# Altium PCB TestBoard V2.PcbDoc
Units mil, origin at the board's own origin, x right, y up, seen from the top; angles counter-clockwise.
Board outline 6879.37 x 4267.72 mil, 2 copper layers (Top Layer, Bottom Layer); 5 components, 44 nets, 132 pads, 74 vias.
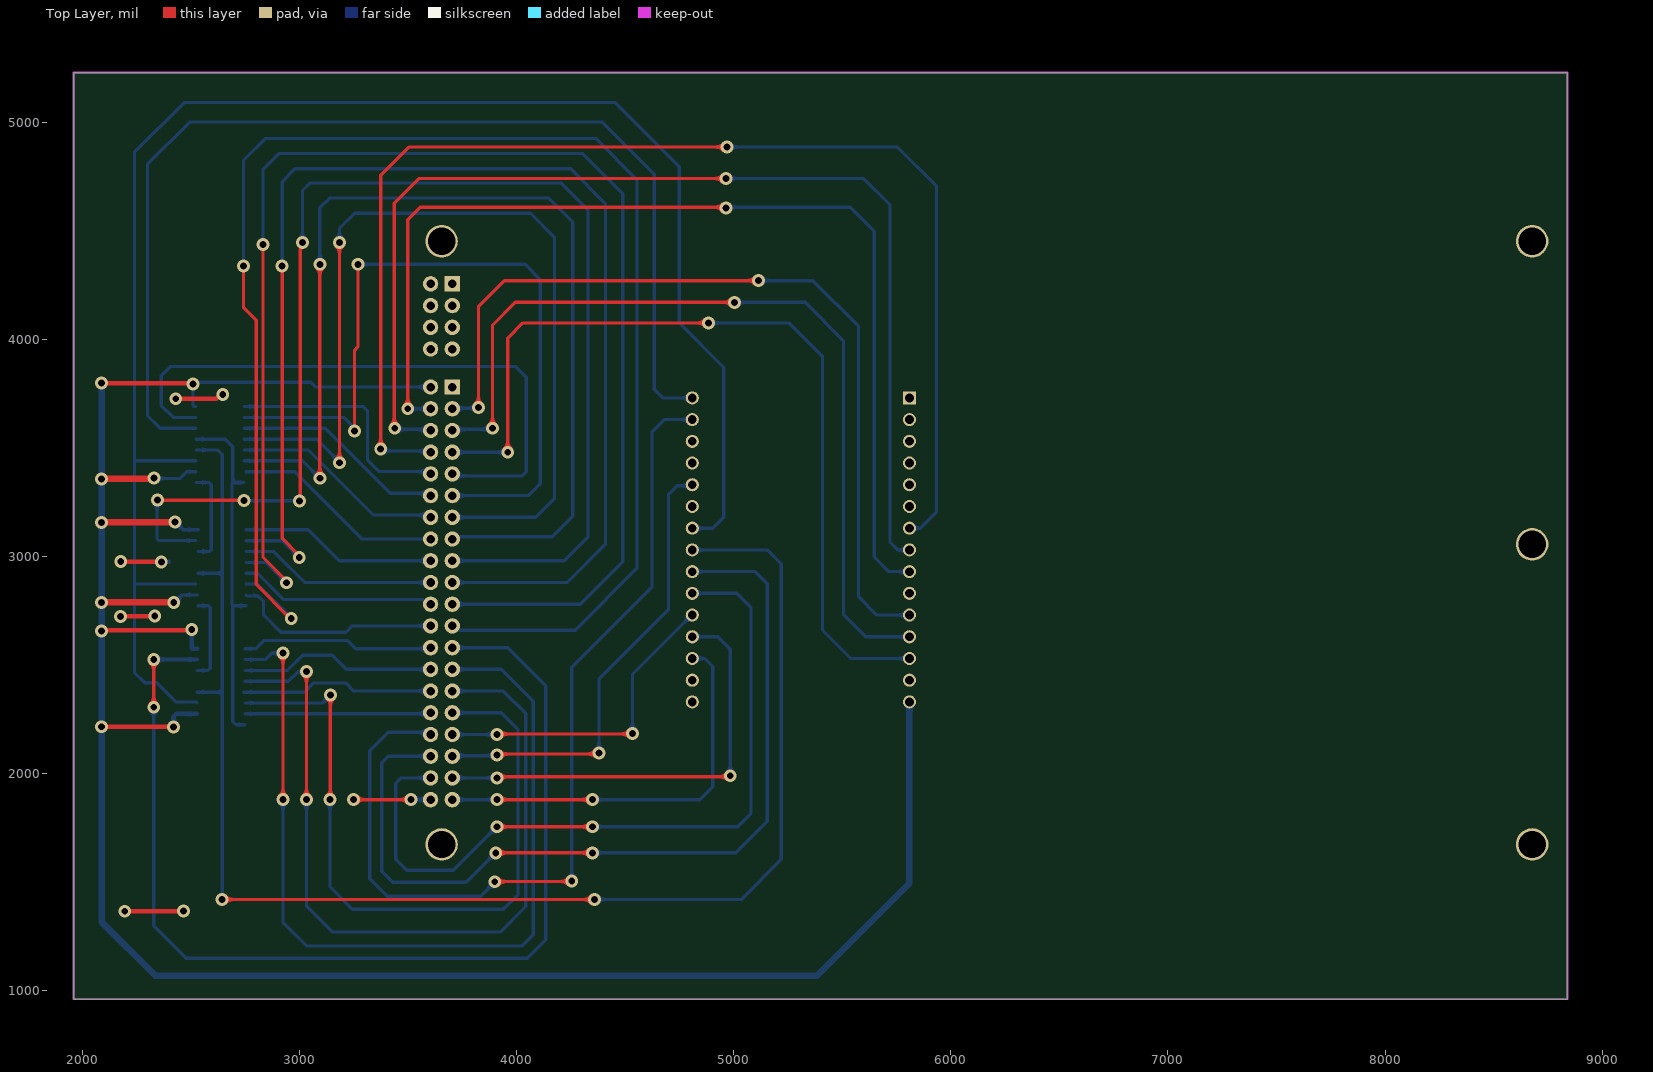
[diagram p0: Top Layer view]
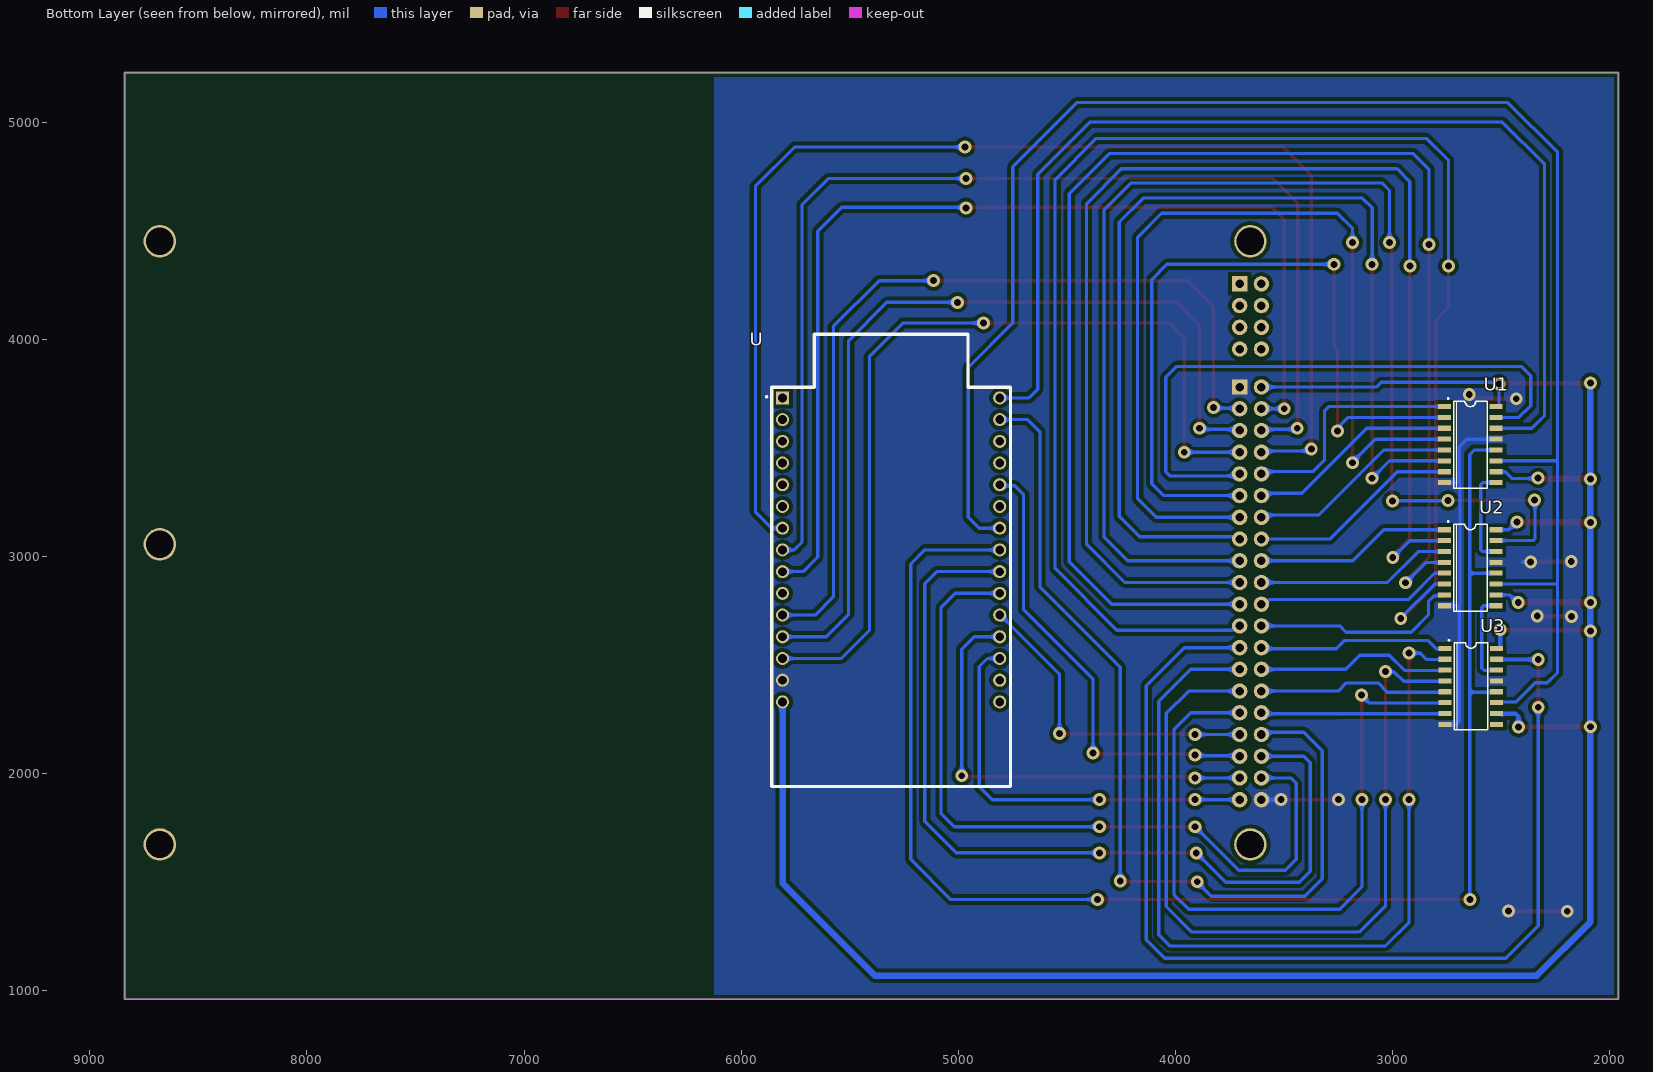
[diagram p1: Bottom Layer view, seen from below]
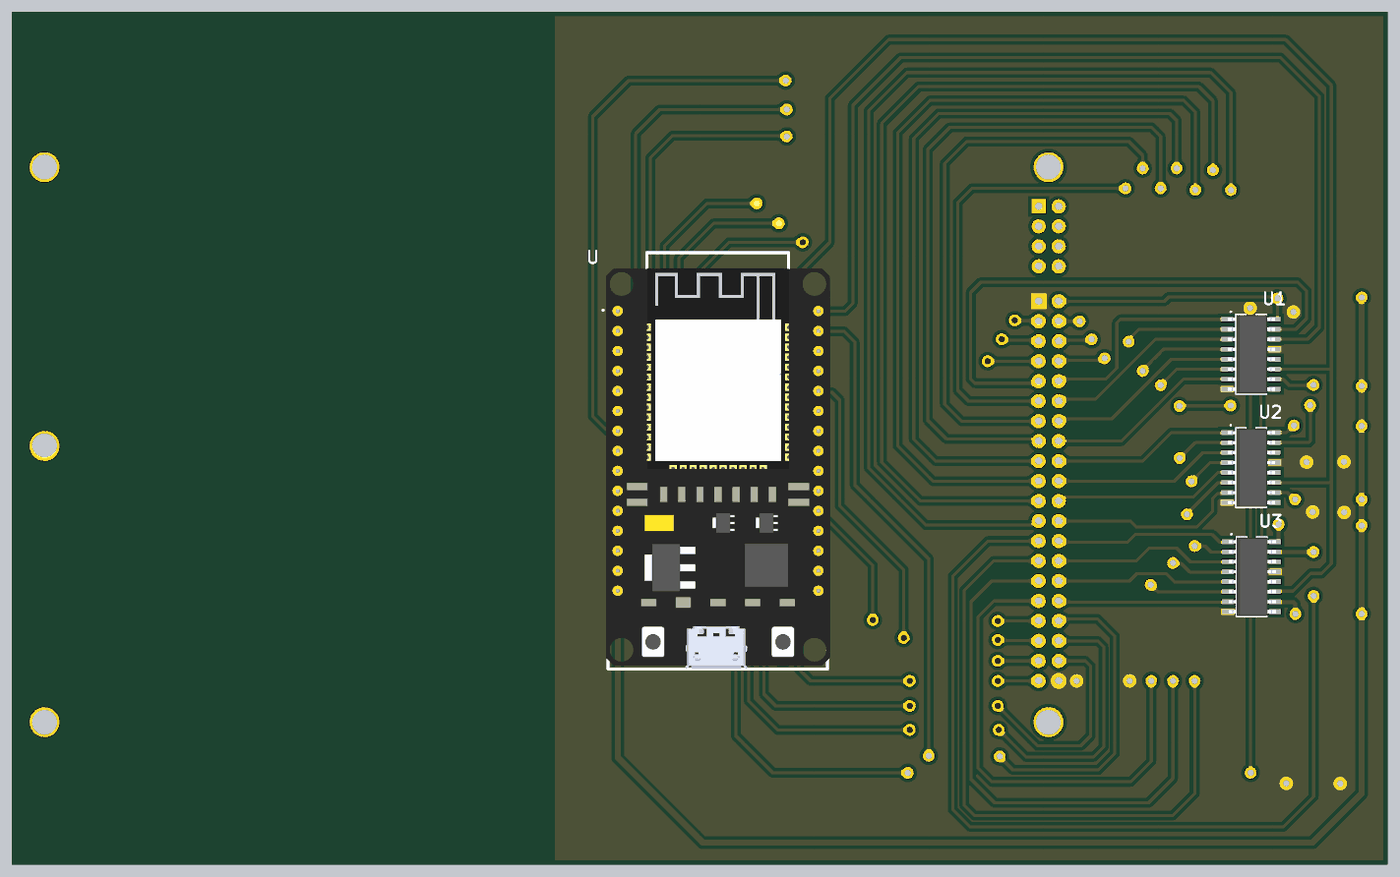
[diagram p2: 3D render of the assembled board from below, using the file's embedded part models]

## Layer stack, top to bottom
Top Solder: solder mask 0.4, Solder Resist, Dk 3.5
Top Layer: signal copper 1.4
Dielectric 1: dielectric 12.6, FR-4, Dk 4.8
Bottom Layer: signal copper 1.4
Bottom Solder: solder mask 0.4, Solder Resist, Dk 3.5

## Board outline
1960.63,960.63 1960.63,5228.35 8840,5228.35 8840,960.63

## Design rules (kind name [scope] priority, off if disabled: settings)
Clearance [All] p1: gap=17 ignorepadtopadclearanceinfootprint=FALSE
PlaneConnect [All] p1: planeconnectstyle=Direct reliefexpansion=20 reliefentries=4 reliefconductorwidth=10 reliefairgap=10
PolygonConnect [All] p1: connectstyle=Direct reliefconductorwidth=10 reliefentries=4 polygonreliefangle="90 Angle" airgapwidth=10
RoutingVias [All] p1: holewidth=31.5 width=59.06 viastyle="Through Hole" minholewidth=31.5 minwidth=59.06 maxholewidth=31.5 maxwidth=59.06
SolderMaskExpansion [All] p1: expansion=4 istentingtop=FALSE
Width [All] p1: maxlimit=30 minlimit=15 preferedwidth=20
29 further rules are at their usual default settings.

## Components (designator, comment, footprint, x,y, rotation, side; value= is the part's Value field where it differs from the comment)
U "ESP32-DEVKITC" MODULE_ESP32-DEVKITC 5310,2830.39 r180 bottom
U1 "LOGIC-74HC595N(DIP16)" SO16 2642.87,3515 r270 bottom
U2 "LOGIC-74HC595N(DIP16)" SO16 2642.87,2947.83 r270 bottom
U3 "LOGIC-74HC595N(DIP16)" SO16 2639.76,2401.57 r270 bottom
? "TFT" "Female Header 20x2" 3705,3780 r180 top

## Footprints (in the part's own frame and the unit in brackets; to place one, negate y for a bottom-side part, rotate by r counter-clockwise, add the part's x,y. Pads: shape width x height; smd on the part's side, far side on the other; paste and mask are expansions set on the pad)
"Female Header 20x2" [mm]
  rect 1.8x1.8 hole 1: 1(0,0) 1-1(0,-12.065)
  round 1.8 hole 1: 1-2(2.54,-12.065) 1-3(0,-9.525) 1-4(2.54,-9.525) 1-5(0,-6.985) 1-6(2.54,-6.985) 1-7(0,-4.445) 1-8(2.54,-4.445) 2(2.54,0) 2(2.54,0) 3(0,2.54) 4(2.54,2.54) 5(0,5.08) 6(2.54,5.08) 7(0,7.62) 8(2.54,7.62) 9(0,10.16) 10(2.54,10.16) 11(0,12.7) 12(2.54,12.7) 13(0,15.24) 14(2.54,15.24) 15(0,17.78) 16(2.54,17.78) 17(0,20.32) 18(2.54,20.32) 19(0,22.86) 20(2.54,22.86) 21(0,25.4) 22(2.54,25.4) 23(0,27.94) 24(2.54,27.94) 25(0,30.48) 26(2.54,30.48) 27(0,33.02) 28(2.54,33.02) 29(0,35.56) 30(2.54,35.56) 31(0,38.1) 32(2.54,38.1) 33(0,40.64) 34(2.54,40.64) 35(0,43.18) 36(2.54,43.18) 37(0,45.72) 38(2.54,45.72) 39(0,48.26) 40(2.54,48.26)
  round 3.8 hole 3.2: ""(-126.3,-17.05) ""(-126.3,18.4) ""(-126.3,53.5) ""(1.25,53.5) ""(1.25,-17.05)
  body extent -128.89,-19.67 3.81,56.13, height 12.72
MODULE_ESP32-DEVKITC [mm]
  rect 1.53x1.53 hole 1.02: 1(-12.7,22.85)
  round 1.53 hole 1.02: 2(-12.7,20.31) 3(-12.7,17.77) 4(-12.7,15.23) 5(-12.7,12.69) 6(-12.7,10.15) 7(-12.7,7.61) 8(-12.7,5.07) 9(-12.7,2.53) 10(-12.7,-0.01) 11(-12.7,-2.55) 12(-12.7,-5.09) 13(-12.7,-7.63) 14(-12.7,-10.17) 15(-12.7,-12.71) 16(12.7,-12.71) 17(12.7,-10.17) 18(12.7,-7.63) 19(12.7,-5.09) 20(12.7,-2.55) 21(12.7,-0.01) 22(12.7,2.53) 23(12.7,5.07) 24(12.7,7.61) 25(12.7,10.15) 26(12.7,12.69) 27(12.7,15.23) 28(12.7,17.77) 29(12.7,20.31) 30(12.7,22.85)
  silkscreen extent -14.67,-22.61 13.95,30.3, body extent -14.22,-22.61 14.28,28.32, height 15.57
SO16 [mm]
  rect 0.6x1.5 smd: 1(-4.445,-3.025) 2(-3.175,-3.025) 3(-1.905,-3.025) 4(-0.635,-3.025) 5(0.635,-3.025) 6(1.905,-3.025) 7(3.175,-3.025) 8(4.445,-3.025) 9(4.445,3) 10(3.175,3) 11(1.905,3) 12(0.635,3) 13(-0.635,3) 14(-1.905,3) 15(-3.175,3) 16(-4.445,3)
  silkscreen extent -5.44,-2.61 5.08,1.96, body extent -4.95,-2.92 4.95,3.08, height 1.75

## Part data
U: "- Transceiver; 802.11 b/g/n _Wi-Fi, WiFi, WLAN_, BluetoothÂ® Smart Ready 4.x Dual Mode For Use With ESP-WROOM-32", Package=None, Availability=Unavailable, MF="Espressif Systems", MP=ESP32-DEVKITC-32D-F, Price=None, SnapEDA_Link=https://www.snapeda.com/parts/ESP32-DEVKITC-32D-F/Espressif%20Systems/view-part/4220172/?ref=snap
U1 U2 U3: "Shift Shift Register 1 Element 8 Bit 16-PDIP", Package="SOT38-4-16 Nexperia", Availability="In Stock", Check_prices=https://www.snapeda.com/parts/74HC595N/Texas+Instruments/view-part/?ref=eda, MF="Texas Instruments", MP=74HC595N, Price=None, Purchase-URL=https://pricing.snapeda.com/search/part/74HC595N/?ref=eda, SnapEDA_Link=https://www.snapeda.com/parts/74HC595N/Texas+Instruments/view-part/?ref=snap

## Via types
v1: diameter 59.06, hole 31.5, Top Layer to Bottom Layer, 74 vias

## Nets (pads, with @x,y where several pads share a name; then routed paths per layer and width w, separated by ;. In a path a pad name is that pad's centre, name@x,y a point inside that pad or via, vN(x,y) a via of type N, cw(c..) or ccw(c..) an arc to the next point about the centre after c; other vN are vias at no path point)
+5: ?.2 U1.10 U1.16 U2.10 U2.16 U3.10 U3.16 U.15 | length 11338.7
  Top Layer w20: v1(2089.57,2215.55) 2090.06,2215.06 2420.77,2215.06 v1(2421.26,2214.57) ; v1(2089.57,2657.05) 2092.74,2660.22 2501.75,2660.22 v1(2504.92,2663.39) ; v1(2089.57,3799.21) 2092.03,3796.75 2508.37,3796.75 v1(2510.83,3794.29)
  Top Layer w30: v1(2089.57,2787.91) 2089.8,2788.15 2422.01,2788.15 v1(2422.24,2788.39) ; v1(2089.57,3155.51) 2091.04,3156.99 2426.67,3156.99 v1(2428.15,3158.46) ; v1(2089.57,3356.3) 2092.03,3358.76 2328.25,3358.76 v1(2330.71,3361.22)
  Bottom Layer w15: v1(2330.71,3361.22) 2332.68,3359.25 2451.77,3359.25 2482.52,3390 U1.10 ; v1(2422.24,2788.39) 2427.59,2788.39 2461.71,2822.5 U2.10@2530.45,2822.5 ; v1(2428.15,3158.46) 2430.47,3158.46 2466.1,3122.83 U2.16 U2.16@2534.43,3122.83 ; U1.16 2515.14,3690 2510.83,3694.31 v1(2510.83,3794.29) 2519.07,3802.54 3054,3802.54 3076.54,3780 ?.2@3605,3780
  Bottom Layer w20: v1(2421.26,2214.57) 2421.26,2263.16 2432.98,2274.87 U3.10@2529.4,2274.87 ; v1(2504.92,2663.39) 2504.92,2578.39 2508.07,2575.24 U3.16@2529.76,2575.24
  Bottom Layer w30: v1(2089.57,2657.05) v1(2089.57,3799.21) ; v1@2094.57,2642.05 2089.57,2637.05 2089.57,1316.94 2336.51,1070 5385,1070 5810,1495 U.15
GND: ?.1 ?.40 U1.8 U1.13 U2.8 U2.13 U3.8 U3.13 U.14 | length 2860.2
  Top Layer w15: v1(3250,1880) v1(3515,1880)
  Top Layer w20: v1(2177.17,2723.43) 2178.15,2724.41 2333.66,2724.41 v1(2334.65,2725.39) ; v1(2178.15,2976.38) 2178.84,2975.69 2364.31,2975.69 v1(2365,2975) ; v1(2196.85,1366.14) 2197.34,1366.63 2466.04,1366.63 v1(2466.54,1367.13) ; v1(2431.1,3726.38) 2617.38,3726.38 2637.07,3746.06 v1(2647.64,3746.06)
  Bottom Layer w15: U1.13 2660,3540 2694.11,3505.89 2694.11,3340 ; U1.8@2745.24,3340 2694.11,3340 ; U3.8@2750,2225 2708.79,2225 2694.11,2239.67 2694.11,2772.5 2694.11,2778.39 ; U2.8@2755.24,2772.5 2700,2772.5 2694.11,2778.39 ; v1(3515,1880) ?.40 ; 2694.11,2778.39 2690.1,2782.4 2690.1,3335.98 2694.11,3340
  Bottom Layer w20: v1(2365,2975) 2400,2975
LATCH: U1.12 U2.12 U3.12 U.23 | length 6825.1
  Top Layer w15: v1(2645,1420) 4146.59,1420 v1(4360,1420)
  Bottom Layer w15: U1.12 2625,3490 2645.94,3469.06 2645.94,2922.5 ; U3.12@2529.53,2375 2645.94,2375 ; U2.12@2534.76,2922.5 2645.94,2922.5 ; 2645.94,1449.99 2645.94,2375 ; v1(4360,1420) 5035,1420 5220,1605 5220,2965 5155,3030 U.23 ; 2645.94,2375 2645.94,2922.5
LCD_BL: ?.39 U.18 | length 1887.6
  Top Layer w15: v1(3910,1880) v1(4350,1880)
  Bottom Layer w15: ?.39 v1(3910,1880) ; v1(4350,1880) 4845,1880 4904.53,1939.53 4904.53,2493.11 4867.64,2530 U.18
LCD_BUSY: ?.37 U.19 | length 2065.8
  Top Layer w15: v1(3910,1980) 3915,1985 4980,1985 v1(4985,1990)
  Bottom Layer w15: ?.37 v1(3910,1980) ; U.19 4928.07,2630 4985,2573.07 v1(4985,1990)
LCD_CLK/SCL: ?.34 U.29 | length 4324.7
  Top Layer w15: v1(3900,1502.03) 3900.47,1502.5 4243.5,1502.5 v1@4246,1505
  Bottom Layer w15: ?.34 3595,2190 3410,2190 3325,2105 3325,1515 3405,1435 3835,1435 3900,1500 v1(3900,1502.03) ; v1(4255,1505) 4255,2490 4625,2860 4625,3575 4680,3630 U.29
LCD_CS: ?.3 U.11 | length 3989
  Top Layer w15: v1(3825,3685) 3825,4150 3945,4270 v1(5115,4270)
  Bottom Layer w15: ?.3 3707.5,3682.5 3822.5,3682.5 v1(3825,3685) ; v1(5115,4270) 5365,4270 5575.79,4059.21 5575.79,2814.21 5660,2730 U.11
LCD_DC: ?.4 U.9 | length 4886.8
  Top Layer w15: v1(3500,3680) 3500,4551.21 3557.05,4608.27 4961.73,4608.27 v1(4965,4605)
  Bottom Layer w15: v1(3500,3680) ?.4 ; v1(4965,4605) 4968.27,4608.27 5537.4,4608.27 5647.64,4498.03 5647.64,2997.36 5715,2930 U.9
LCD_DIN/SDA: ?.35 U.26 | length 2130.3
  Top Layer w15: v1(3910,2085) 3915,2090 4375,2090 v1(4380,2095)
  Bottom Layer w15: ?.35 3707.5,2082.5 3907.5,2082.5 v1(3910,2085) ; v1(4380,2095) 4380,2435 4700,2755 4700,3285 4740,3325 U.26@4810,3325
LCD_DOUT: ?.36 U.22 | length 4123.1
  Top Layer w15: v1(3905,1635) 4340,1635 v1@4355,1620
  Bottom Layer w15: ?.36 3410,2080 3380,2050 3380,1550 3430,1500 3770,1500 v1(3905,1635) ; v1(4350,1635) 5010,1635 5155,1780 5155,2875 5100,2930 U.22
LCD_PEN: ?.38 U.21 | length 3535.7
  Top Layer w15: v1(3910,1755) v1@4355,1755
  Bottom Layer w15: ?.38 3470,1980 3445,1955 3445,1605 3495,1555 3710,1555 v1(3910,1755) ; v1(4350,1755) 5020,1755 5080,1815 5080,2765 5015,2830 U.21
LCD_RD: ?.5 U.12 | length 4004.1
  Top Layer w15: v1(3890,3590) 3890,4065 3995,4170 v1(5005,4170)
  Bottom Layer w15: ?.5 3710,3585 3885,3585 v1(3890,3590) ; v1(5005,4170) 5330,4170 5505.91,3994.09 5505.91,2733.27 5609.17,2630 U.12
LCD_RESET: ?.7 U.13 | length 4037.7
  Top Layer w15: v1(3960,3480) 3960,4005 4030,4075 v1(4885,4075)
  Bottom Layer w15: ?.7 v1(3960,3480) ; v1(4885,4075) 5255,4075 5410,3920 5410,2658.9 5538.9,2530 U.13
LCD_RPTCS: ?.33 U.20 | length 1493.1
  Top Layer w15: v1(3910,2180) 3912.5,2182.5 4532.5,2182.5 v1(4535,2185)
  Bottom Layer w15: ?.33 v1(3910,2180) ; v1(4535,2185) 4535,2458.6 4806.4,2730 U.20
LCD_TE: ?.8 U.7 | length 5840.7
  Top Layer w15: v1(3375,3495) 3375,4755 3505,4885 v1(4970,4885)
  Bottom Layer w15: v1(3375,3495) 3385,3485 3600,3485 ?.8 ; v1(4970,4885) 5755,4885 5935,4705 5935,3205 5860,3130 U.7
LCD_WR: ?.6 U.8 | length 5245.5
  Top Layer w15: v1(3440,3590) 3437.07,3592.93 3437.07,4627.07 3550,4740 v1(4965,4740)
  Bottom Layer w15: v1(3440,3590) 3445,3585 3600,3585 ?.6 ; v1(4965,4740) 5600,4740 5720.47,4619.53 5720.47,3065.94 5756.42,3030 U.8
Net_9: ?.9 U1.15 | length 2825.5
  Bottom Layer w15: U1.15 2419.06,3640 2365.16,3693.9 2365.16,3831.37 2408.79,3875 3995,3875 4045,3825 4045,3390 4025,3370 3715,3370 ?.9
Net_10: ?.10 U1.1 | length 1120.3
  Bottom Layer w15: U1.1@2745.24,3690 3295,3690 3313.98,3671.02 3313.98,3445.52 3368.81,3390.69 3594.31,3390.69 ?.10
Net_11: ?.11 U1.2 | length 3543.6
  Top Layer w15: v1(3254.92,3577.76) 3254.92,3949.47 3270.31,3964.86 3270.31,4344.37 v1(3270.94,4345)
  Bottom Layer w15: U1.2@2745.24,3640 3205.47,3640 3225.28,3620.19 3225.28,3619.32 3254.92,3589.68 v1(3254.92,3577.76) ; v1@3280,4345 4040,4345 4110,4275 4110,3335 4055,3280 ?.11
Net_12: ?.12 U1.3 | length 988.2
  Bottom Layer w15: U1.3@2745.24,3590 3120,3590 3419.31,3290.69 3594.31,3290.69 ?.12
Net_13: ?.13 U1.4 | length 4342.8
  Top Layer w15: v1(3185,3431.26) v1(3185,4445)
  Bottom Layer w15: U1.4@2745.24,3540 3080.75,3540 v1@3189.48,3431.26 ; v1(3185,4445) 3185,4510 3255,4580 4065,4580 4175,4470 4175,3265 4090,3180 ?.13
Net_14: ?.14 U1.5 | length 988.2
  Bottom Layer w15: U1.5@2745.24,3490 3041.74,3490 3341.06,3190.69 3594.31,3190.69 ?.14
Net_15: ?.15 U1.6 | length 4810.6
  Top Layer w15: v1(3095,3360) v1(3095,4345)
  Bottom Layer w15: U1.6@2745.24,3440 3015,3440 v1(3095,3360) ; v1(3095,4345) 3095,4605 3140,4650 4150,4650 4260,4540 4260,3185 4166.08,3091.08 3741.72,3091.08 3741.33,3090.69 3715.69,3090.69 ?.15
Net_16: ?.16 U1.7 | length 978.2
  Bottom Layer w15: U1.7@2755.24,3390 2980.08,3390 3290.08,3080 ?.16
Net_17: ?.17 U2.15 | length 6006.6
  Top Layer w15: v1(2347.44,3259.84) 2348.43,3258.86 2744.09,3258.86 v1(2745.08,3257.87) ; v1(3000.98,3255.91) 3004.44,3259.36 3004.44,4414.19 3006.57,4416.32 3006.57,4426.57 v1@3020,4440
  Bottom Layer w15: v1(2347.44,3259.84) 2345,3257.4 2345,3081.62 2353.79,3072.83 U2.15 ; v1(2745.08,3257.87) 2746.06,3256.89 3000,3256.89 v1(3000.98,3255.91) ; v1(3015,4445) 3015,4685 3050,4720 4205,4720 4330,4595 4330,3090 4220,2980 ?.17
Net_18: ?.18 U2.1 | length 905.9
  Bottom Layer w15: U2.1@2755.24,3122.5 3042.5,3122.5 3185,2980 3595,2980 ?.18@3600,2985
Net_19: ?.19 U2.2 | length 5961.7
  Top Layer w15: v1(2921.26,4337.6) 2921.26,3083.03 2995.87,3008.43 v1@2995.87,2999.13
  Bottom Layer w15: U2.2@2755.24,3072.5 2922.5,3072.5 v1(3000,2995) ; v1(2921.26,4337.6) 2921.26,4726.26 2980,4785 4250,4785 4410,4625 4410,3055 4235,2880 ?.19
Net_20: ?.20 U2.3 | length 908.8
  Bottom Layer w15: U2.3@2755.24,3022.5 2883.5,3022.5 3026,2880 ?.20
Net_21: ?.21 U2.4 | length 6497.5
  Top Layer w15: v1(2833.66,4437.01) 2833.66,2995.03 2940.89,2887.8 v1(2940.89,2878.51)
  Bottom Layer w15: U2.4@2755.24,2972.5 2846.41,2972.5 2940.41,2878.51 v1(2940.89,2878.51) ; v1(2833.66,4437.01) 2833.66,4783.66 2905,4855 4305,4855 4490,4670 4490,2975 4295,2780 ?.21
Net_22: ?.22 U2.5 | length 908.8
  Bottom Layer w15: U2.5@2755.24,2922.5 2807.9,2922.5 2929.21,2801.18 3568.7,2801.18 3589.88,2780 ?.22
Net_23: ?.23 U2.6 | length 7178.5
  Top Layer w15: v1(2743.11,4336.61) 2743.11,4146.65 2801.66,4088.1 2801.66,2871.6 2959.68,2713.58 v1(2963.58,2713.58)
  Bottom Layer w15: v1(2743.11,4336.61) 2743.11,4823.11 2845,4925 4365,4925 4555,4735 4555,2944.5 4270.5,2660 3740.12,2660 3720.12,2680 ?.23 ; U2.6@2755.24,2872.5 2807.62,2872.5 2963.58,2716.54 v1(2963.58,2713.58)
Net_24: ?.24 U2.7 | length 969.4
  Bottom Layer w15: U2.7@2755.24,2822.5 2759.55,2818.19 2809.76,2818.19 2835.63,2792.32 2835.63,2730.32 2915.22,2650.73 3215.47,2650.73 3244.74,2680 ?.24
Net_25: ?.25 U3.15 | length 4999.6
  Top Layer w15: v1@2329.72,2305.12 2329.86,2305.26 2329.86,2524.86 v1(2330,2525)
  Bottom Layer w15: v1@2329.72,2305.12 2329.72,1300.28 2480,1150 4050,1150 4135,1235 4135,2405 3960,2580 ?.25
  Bottom Layer w20: v1(2330,2525) U3.15@2529.53,2525
  other v1: 2330,2305.12
Net_26: ?.26 U3.1 | length 891.6
  Bottom Layer w15: U3.1@2750,2575 2800,2575 2838.19,2613.19 3221.46,2613.19 3259.65,2575 ?.26@3610,2575
Net_27: ?.27 U3.2 | length 4160
  Top Layer w15: v1(2925,1880) v1(2925,2555)
  Bottom Layer w15: U3.2@2750,2525 2842.86,2525 2872.86,2555 v1@2930,2555 ; v1(2925,1880) 2925,1315 3033.56,1206.44 4026.44,1206.44 4077.93,1257.93 4077.93,2332.07 3930,2480 ?.27
Net_28: ?.28 U3.3 | length 910.9
  Bottom Layer w15: U3.3@2750,2475 2946.07,2475 3016.07,2545 3151.85,2545 3216.85,2480 ?.28
Net_29: ?.29 U3.4 | length 3758.9
  Top Layer w15: v1(3033.33,1880) v1(3033.33,2470)
  Bottom Layer w15: U3.4@2750,2425 2949.57,2425 2992.16,2467.59 3030.93,2467.59 v1(3033.33,2470) ; v1(3033.33,1880) 3033.33,1391.67 3155,1270 3925,1270 4042.93,1387.93 4042.93,2277.07 3940,2380 ?.29
Net_30: ?.30 U3.5 | length 893
  Bottom Layer w15: U3.5@2745,2375 2750,2375 3025,2375 3067.32,2417.32 3213.58,2417.32 3250.91,2380 ?.30
Net_31: ?.31 U3.6 | length 3325.4
  Top Layer w15: v1(3141.67,1880) 3143.18,1881.51 3143.18,2359.71 v1(3144.68,2361.22)
  Bottom Layer w15: U3.6@2750,2325 3108.46,2325 v1(3144.68,2361.22) ; v1(3141.67,1880) 3141.67,1478.33 3245,1375 3940,1375 4007.93,1442.93 4007.93,2202.07 3930,2280 ?.31
Net_32: ?.32 U3.7 | length 860
  Bottom Layer w15: U3.7@2750,2275 3259.96,2275 ?.32@3610,2275
NetU1_9: U1.9 U2.14 | length 437.7
  Bottom Layer w15: U1.9 2586.21,3340 2595,3331.21 2595,3031.29 2586.21,3022.5 U2.14@2534.76,3022.5
NetU2_9: U2.9 U3.14 | length 402
  Bottom Layer w15: U3.14@2529.53,2475 2580,2475 2590,2485 2590,2763.39 2580.89,2772.5 U2.9@2534.76,2772.5
SPI_MOSI: U1.14 U.30 | length 5100.4
  Bottom Layer w15: U1.14 2360,3590 2301.18,3648.82 2301.18,4806.18 2495,5000 4395,5000 4551.7,4843.3 4635,4760 4635,3770 4675,3730 U.30
SPI_SCLK: U1.11 U2.11 U3.11 U.24 | length 7902.6
  Bottom Layer w15: U2.11 2243.31,2872.83 2241.14,2875 ; U1.11 2243.15,3440 2241.14,3437.99 ; U3.11@2529.53,2325 2525.22,2329.31 2433.48,2329.31 2344.86,2417.93 2288.76,2417.93 2241.14,2465.55 2241.14,2875 ; U.24 4905,3130 4955,3180 4955,3870 4750,4075 4750,4795 4455,5090 2470,5090 2241.14,4861.14 2241.14,3437.99 ; 2241.14,2875 2241.14,3437.99
pads on no net: ?. ?.1-1 ?.1-2 ?.1-3 ?.1-4 ?.1-5 ?.1-6 ?.1-7 ?.1-8 U3.9 U.1 U.2 U.3 U.4 U.5 U.6 U.10 U.16 U.17 U.25 U.27 U.28

## Polygon pours and split planes (outlines as drawn)
GND on Bottom Layer "GND_L02_P002" (solid, remove dead copper, pour order 2): 1960.63,960.63 1960.63,5228.35 8840,5228.35 8840,960.63

## Keep-outs
Keep-Out Layer:
  lines w7.87: 1960.63,960.63 1960.63,5228.35 8840,5228.35 8840,1440 8840,960.63 1960.63,960.63

## Other copper
Bottom Layer:
  pour cut-out: 2624.02,3319.88 2623,3320.89 2623,3459.55 2615.5,3467.06 2563.39,3467.06 2563.39,3362.94 2595.72,3362.94 2616.19,3342.46 2616.19,3320.92 2615.16,3319.88
  pour cut-out: 2568.15,2352.06 2623,2352.06 2623,2197.86 2622.68,2198.19 2568.15,2198.19
  pour cut-out: 2573.39,2899.56 2623,2899.56 2623,2752 2622.05,2752.95 2610.24,2752.95 2610.24,2773.12 2587.92,2795.44 2573.39,2795.44
  pour cut-out: 6124.02,5325 6124.02,855 9075,855 8945,985 8945,5325